# Altium PCB 001_BMS_MASTER.PcbDoc
Units mm, origin at the board's own origin, x right, y up, seen from the top; angles counter-clockwise.
Board outline 170.97 x 159.64 mm, 2 copper layers (Top Layer, Bottom Layer); 40 components, 0 nets, 208 pads, 0 vias.
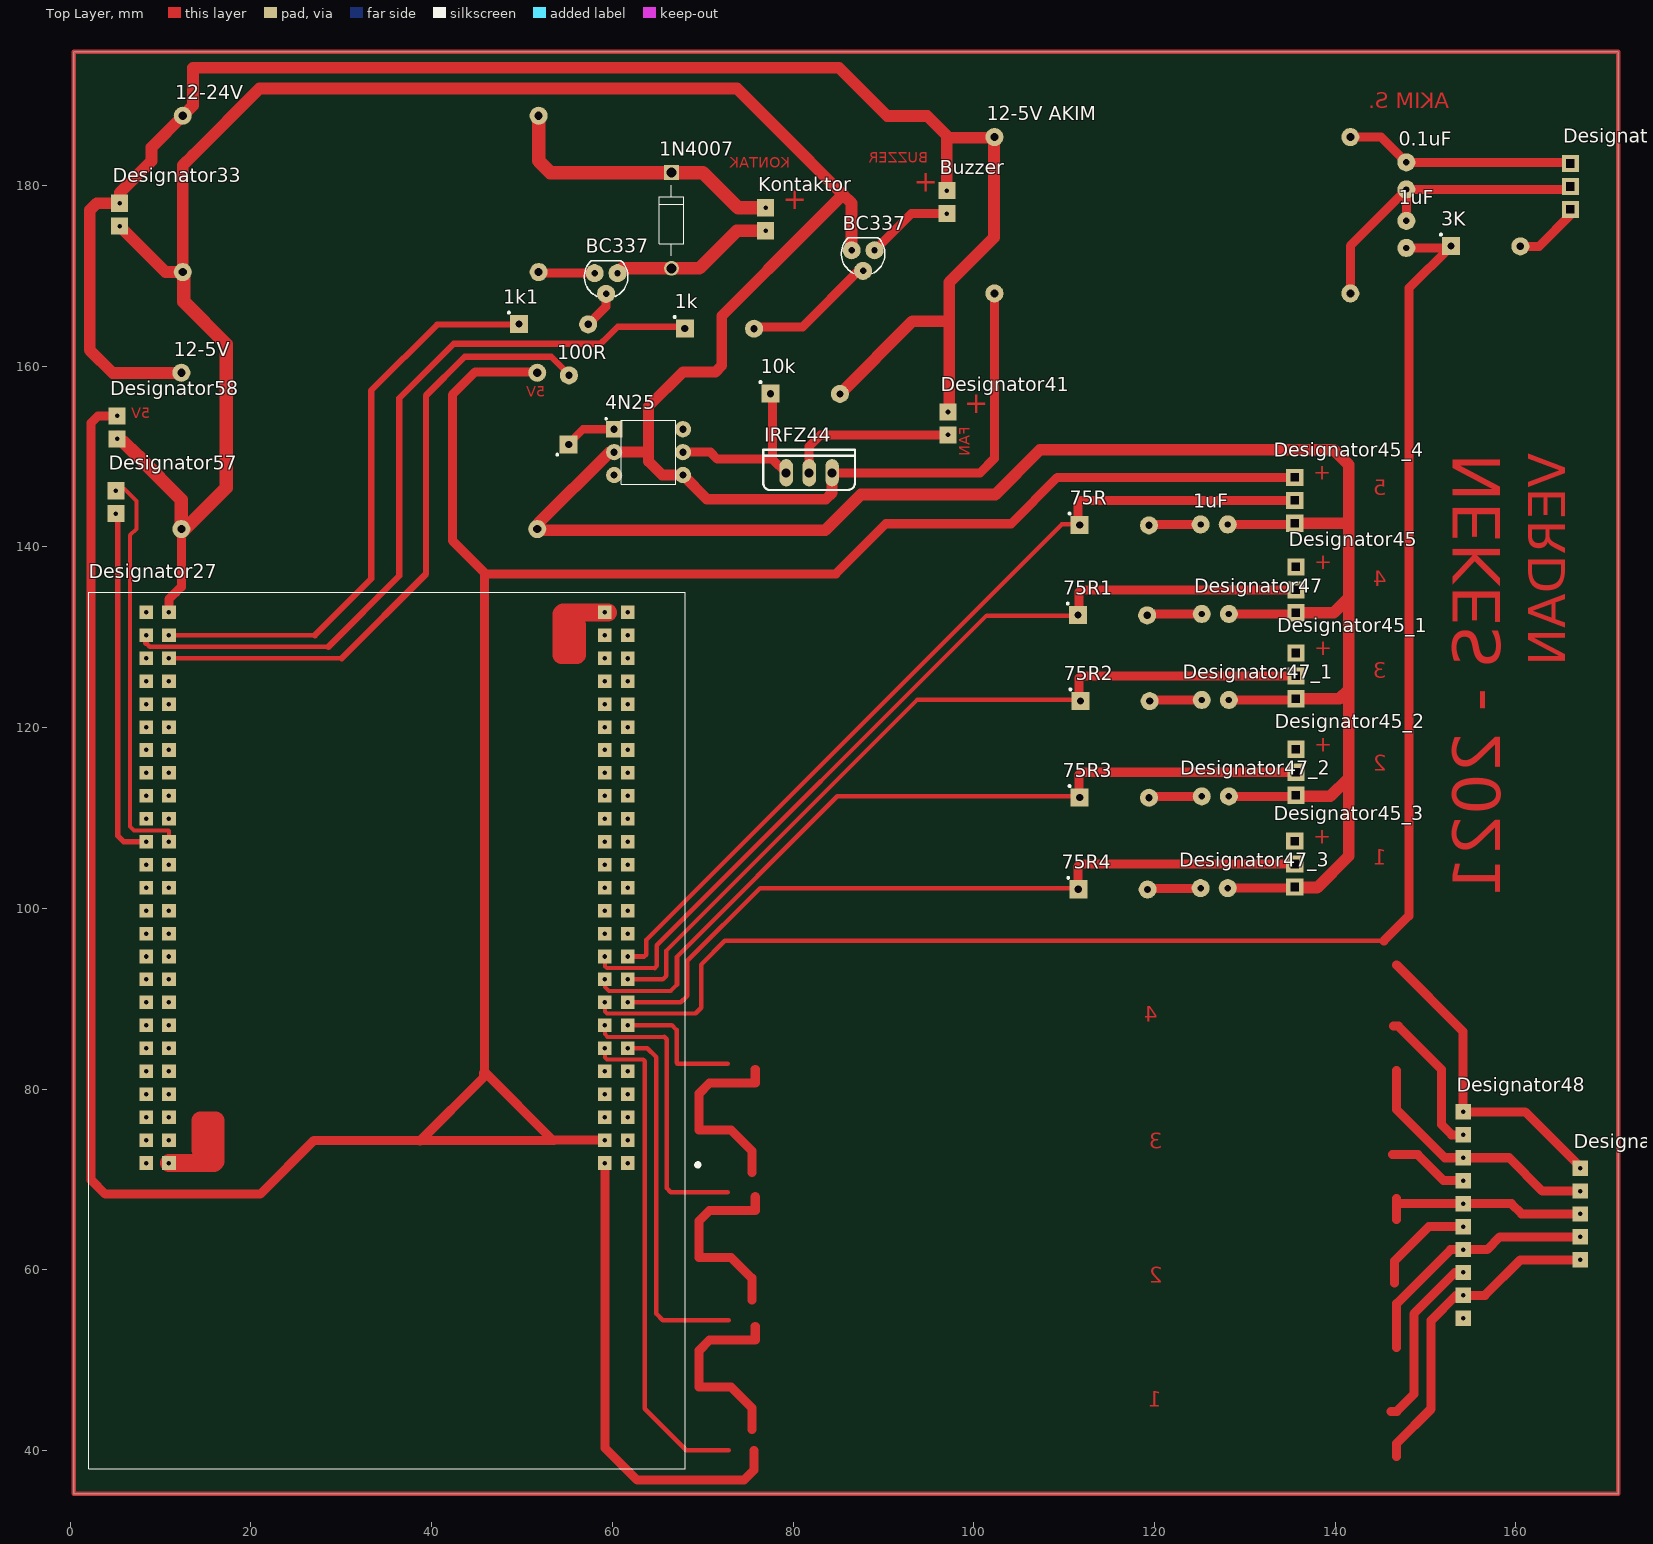
[diagram p0: Top Layer view]
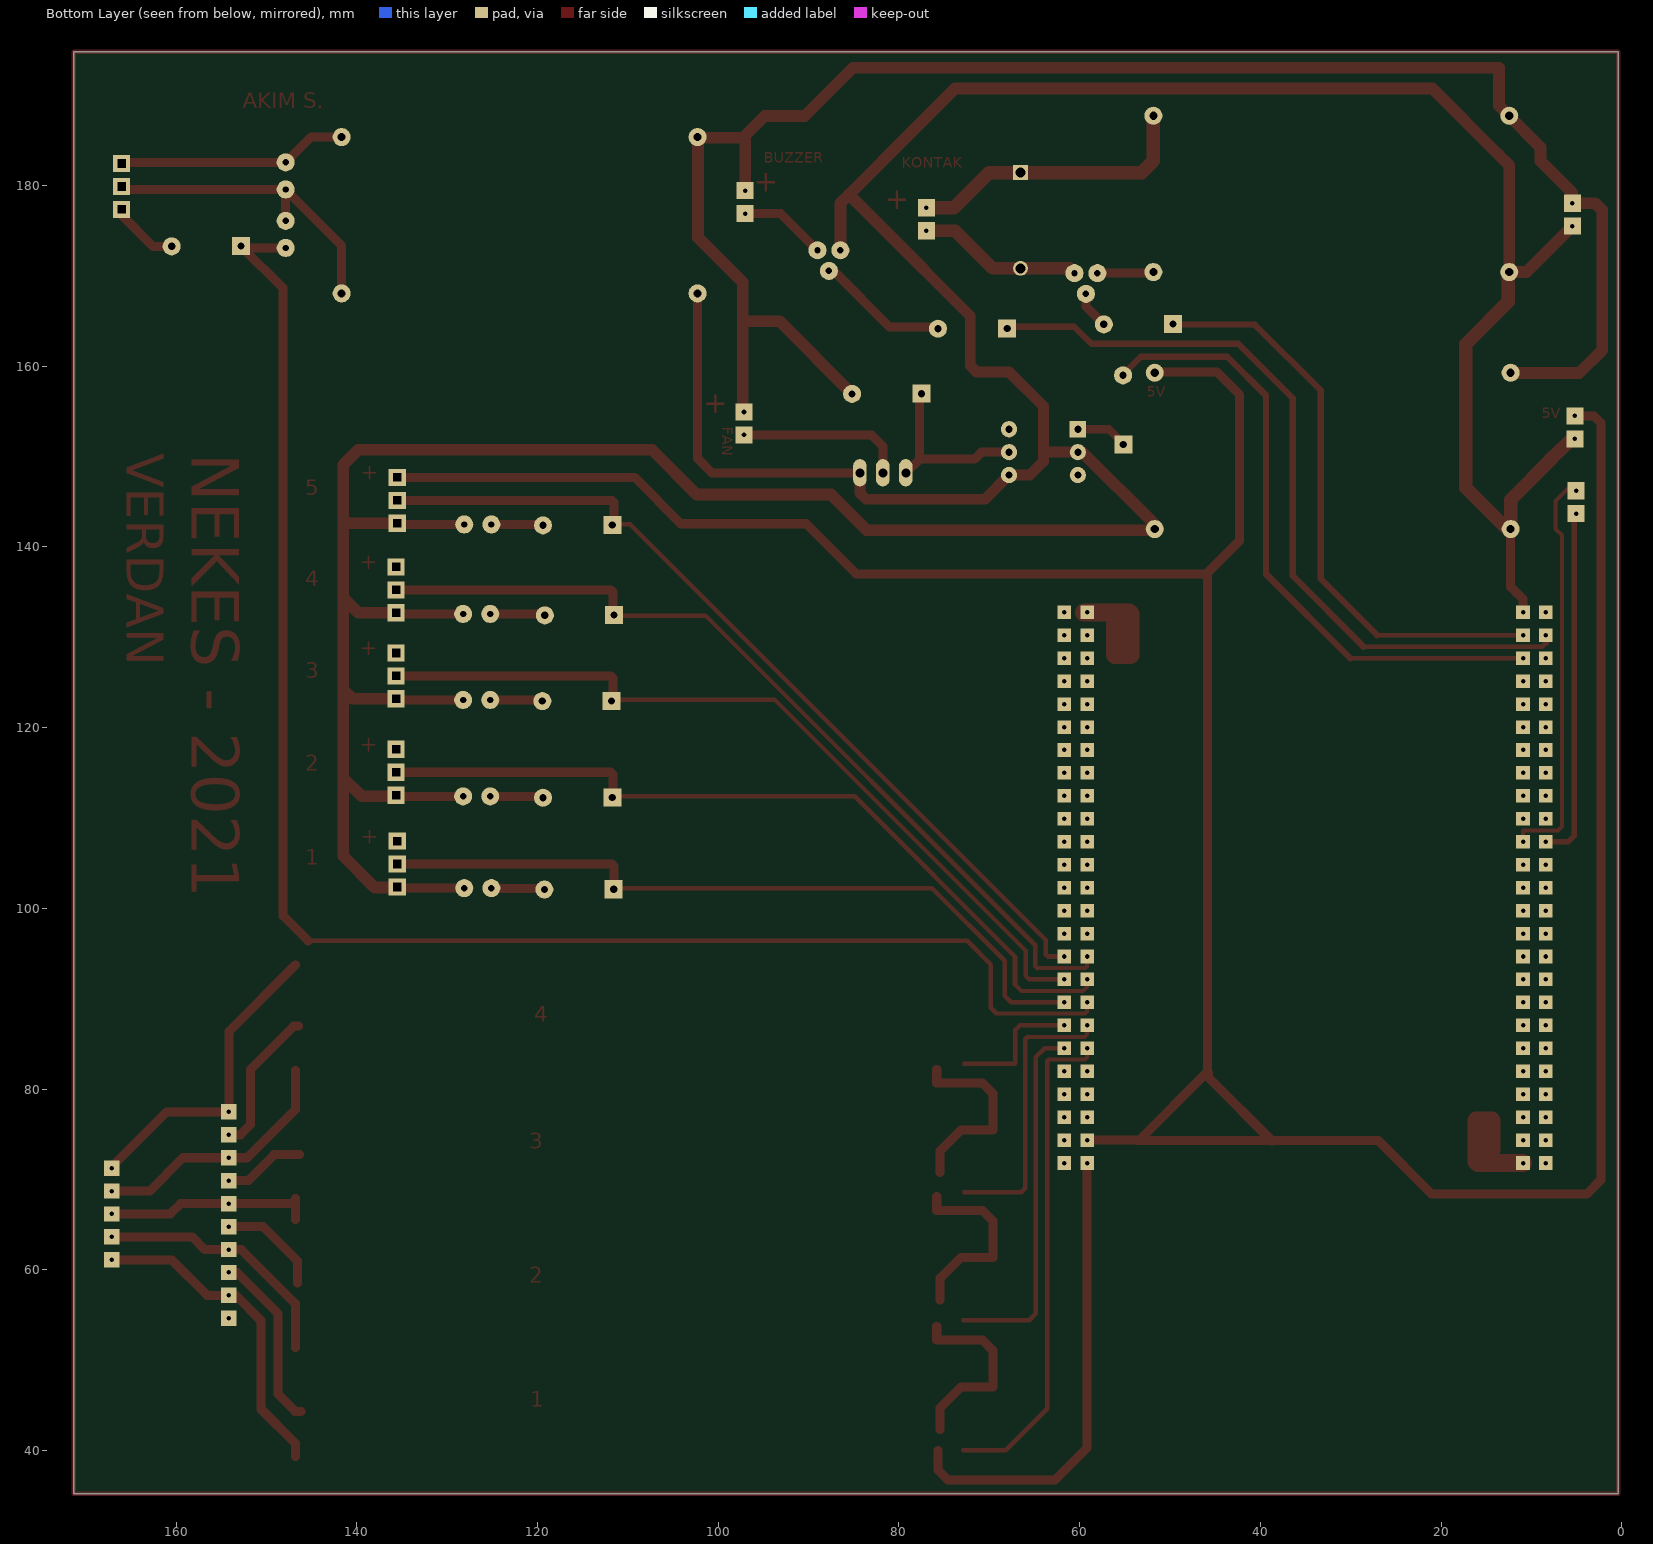
[diagram p1: Bottom Layer view, seen from below]

## Layer stack, top to bottom
Top Solder: solder mask 0.0102, Solder Resist, Dk 3.5
Top Layer: signal copper 0.0356
Dielectric 1: dielectric 0.32, FR-4, Dk 4.8
Bottom Layer: signal copper 0.0356
Bottom Solder: solder mask 0.0102, Solder Resist, Dk 3.5

## Board outline
0.381,35.179 0.381,194.818 171.348,194.818 171.348,35.179

## Design rules (kind name [scope] priority, off if disabled: settings)
Clearance [All] p1: gap=0.254 ignorepadtopadclearanceinfootprint=FALSE except(0: Arc-Hole Track-Hole SMDPad-Hole THPad-Hole Via-Hole Fill-Hole Poly-Hole Region-Hole Text-Hole)
PolygonConnect [All] p1: connectstyle=Relief reliefconductorwidth=0.254 reliefentries=4 polygonreliefangle="90 Angle" airgapwidth=0.254
RoutingVias [All] p1: holewidth=0.711 width=1.27 viastyle="Through Hole" minholewidth=0.711 minwidth=1.27 maxholewidth=0.711 maxwidth=1.27
SolderMaskExpansion [All] p1: expansion=0.102 istentingtop=FALSE
Width [All] p1: maxlimit=0.254 minlimit=0.254 preferedwidth=0.254
30 further rules are at their usual default settings.

## Components (designator, comment, footprint, x,y, rotation, side; value= is the part's Value field where it differs from the comment)
0.1uF "Comment" 10NF_KUTUPSUZ 147.888,179.576 r90 top
1k "Comment" "100 RESISTOR" 67.996,164.186 r0 top
1k1 "Comment" "100 RESISTOR" 49.632,164.668 r0 top
1N4007 "Comment" 1N4007 66.548,176.149 r270 top
1uF "Comment" 10NF_KUTUPSUZ 147.888,173.099 r90 top
1uF "Comment" 10NF_KUTUPSUZ 128.12,142.494 r180 top
3K "Comment" "100 RESISTOR" 152.816,173.305 r0 top
4N25 "Comment" 4N25-OPTO 64.008,150.495 r0 top
10k "Comment" "100 RESISTOR" 77.495,156.972 r0 top
12-5V "Comment" "HW-286 DC DC" 12.289,141.986 r0 top
"12-5V AKIM" "Comment" "HW-286 DC DC" 141.695,185.37 r180 top
12-24V "Comment" "HW-286 DC DC" 12.446,170.434 r0 top
75R "Comment" "100 RESISTOR" 111.709,142.418 r0 top
75R1 "Comment" "100 RESISTOR" 111.506,132.461 r0 top
75R2 "Comment" "100 RESISTOR" 111.785,122.961 r0 top
75R3 "Comment" "100 RESISTOR" 111.709,112.268 r0 top
75R4 "Comment" "100 RESISTOR" 111.557,102.108 r0 top
100R "Comment" "100 RESISTOR" 55.169,151.308 r90 top
BC337 "Comment" BC557 87.757,172.466 r180 top
BC337 "Comment" BC557 59.309,169.926 r180 top
Buzzer "Comment" 2XHEADER1 97.028,176.911 r90 top
Designator27 "Comment" STM32F4DISCOVERY 35.052,86.487 r180 top
Designator33 "Comment" 2XHEADER1 5.461,175.514 r90 top
Designator41 "Comment" 2XHEADER1 97.155,152.4 r90 top
Designator45 "Comment" 3XHEADER1 135.661,132.715 r90 top
Designator45_1 "Comment" 3XHEADER1 135.661,123.19 r90 top
Designator45_2 "Comment" 3XHEADER1 135.661,112.522 r90 top
Designator45_3 "Comment" 3XHEADER1 135.534,102.362 r90 top
Designator45_4 "Comment" 3XHEADER1 135.534,142.621 r90 top
Designator47 "Comment" 10NF_KUTUPSUZ 128.247,132.588 r180 top
Designator47_1 "Comment" 10NF_KUTUPSUZ 128.247,123.063 r180 top
Designator47_2 "Comment" 10NF_KUTUPSUZ 128.247,112.395 r180 top
Designator47_3 "Comment" 10NF_KUTUPSUZ 128.12,102.235 r180 top
Designator48 "Comment" "10XHEADER1 - DUPLICATE" 154.178,54.61 r90 top
Designator49 "Comment" 5XHEADER 167.132,61.087 r90 top
Designator50 "Comment" 3XHEADER1 166.049,177.369 r90 top
Designator57 "Comment" 2XHEADER1 5.055,143.688 r90 top
Designator58 "Comment" 2XHEADER1 5.182,151.968 r90 top
IRFZ44 "Comment" IRFZ44N 81.788,148.209 r0 top
Kontaktor "Comment" 2XHEADER1 76.962,175.006 r90 top

## Footprints (in the part's own frame and the unit in brackets; to place one, negate y for a bottom-side part, rotate by r counter-clockwise, add the part's x,y. Pads: shape width x height; smd on the part's side, far side on the other; paste and mask are expansions set on the pad)
1N4007 [mm]
  round 1.65 hole 1.1: A(5.3,0)
  rect 1.65x1.65 hole 1.1: C(-5.3,0)
  silkscreen extent -3.9,-1.35 3.9,1.35
2XHEADER1 [mm]
  rect 1.9x1.9 hole 0.5: 1(0,0) 2(2.54,0)
3XHEADER1 [mm]
  rect 1.9x1.9 hole 0.9 square: 1(0,0) 2(2.54,0) 3(5.08,0)
4N25-OPTO [mm]
  rect 1.8x1.8 hole 0.8: 1(-3.81,2.54)
  round 1.8 hole 0.8: 2(-3.81,0) 3(-3.81,-2.54) 4(3.81,-2.54) 5(3.81,0) 6(3.81,2.54)
  silkscreen extent -4.8,-3.56 3,3.8
5XHEADER [mm]
  rect 1.7x1.7 hole 0.5: 1(0,0) 2(2.54,0) 3(5.08,0) 4(7.62,0) 5(10.16,0)
10NF_KUTUPSUZ [mm]
  round 2 hole 0.7: 1(0,0) 2(3,0)
"10XHEADER1 - DUPLICATE" [mm]
  rect 1.7x1.7 hole 0.5: 1(0,0) 2(2.54,0) 3(5.08,0) 4(7.62,0) 5(10.16,0) 6(12.7,0) 7(15.24,0) 8(17.78,0) 9(20.32,0) 10(22.86,0)
"100 RESISTOR" [mm]
  rect 2x2 hole 0.8 mask+0.05: 1(0.025,0)
  round 2 hole 0.8 mask+0.05: 2(7.696,-0.025)
  silkscreen extent -1.18,1.18 -1,1.36, body extent -0.16,-1.08 7.94,0.92, height 2
BC557 [mm]
  round 2 hole 0.7: B(0,1.905) C(-1.27,-0.381) E(1.27,-0.381)
  silkscreen extent -2.41,-1.78 2.41,2.2
"HW-286 DC DC" [mm]
  round 2 hole 0.9: 1(0,0) 1(0,17.3) 1(39.4,0) 1(39.4,17.3)
IRFZ44N [mm]
  oval 1.508x3.016 hole 1: 1(-2.54,0) 2(0,0) 3(2.54,0)
  silkscreen extent -5.08,-1.91 5.08,2.54
STM32F4DISCOVERY [mm]
  rect 1.5x1.5 hole 0.5: P1_1(-26.67,14.68) P1_2(-24.13,14.68) P1_3(-26.67,12.14) P1_4(-24.13,12.14) P1_5(-26.67,9.6) P1_6(-24.13,9.6) P1_7(-26.67,7.06) P1_8(-24.13,7.06) P1_9(-26.67,4.52) P1_10(-24.13,4.52) P1_11(-26.67,1.98) P1_12(-24.13,1.98) P1_13(-26.67,-0.56) P1_14(-24.13,-0.56) P1_15(-26.67,-3.1) P1_16(-24.13,-3.1) P1_17(-26.67,-5.64) P1_18(-24.13,-5.64) P1_19(-26.67,-8.18) P1_20(-24.13,-8.18) P1_21(-26.67,-10.72) P1_22(-24.13,-10.72) P1_23(-26.67,-13.26) P1_24(-24.13,-13.26) P1_25(-26.67,-15.8) P1_26(-24.13,-15.8) P1_27(-26.67,-18.34) P1_28(-24.13,-18.34) P1_29(-26.67,-20.88) P1_30(-24.13,-20.88) P1_31(-26.67,-23.42) P1_32(-24.13,-23.42) P1_33(-26.67,-25.96) P1_34(-24.13,-25.96) P1_35(-26.67,-28.5) P1_36(-24.13,-28.5) P1_37(-26.67,-31.04) P1_38(-24.13,-31.04) P1_39(-26.67,-33.58) P1_40(-24.13,-33.58) P1_41(-26.67,-36.12) P1_42(-24.13,-36.12) P1_43(-26.67,-38.66) P1_44(-24.13,-38.66) P1_45(-26.67,-41.2) P1_46(-24.13,-41.2) P1_47(-26.67,-43.74) P1_48(-24.13,-43.74) P1_49(-26.67,-46.28) P1_50(-24.13,-46.28) P2_1(24.13,14.68) P2_2(26.67,14.68) P2_3(24.13,12.14) P2_4(26.67,12.14) P2_5(24.13,9.6) P2_6(26.67,9.6) P2_7(24.13,7.06) P2_8(26.67,7.06) P2_9(24.13,4.52) P2_10(26.67,4.52) P2_11(24.13,1.98) P2_12(26.67,1.98) P2_13(24.13,-0.56) P2_14(26.67,-0.56) P2_15(24.13,-3.1) P2_16(26.67,-3.1) P2_17(24.13,-5.64) P2_18(26.67,-5.64) P2_19(24.13,-8.18) P2_20(26.67,-8.18) P2_21(24.13,-10.72) P2_22(26.67,-10.72) P2_23(24.13,-13.26) P2_24(26.67,-13.26) P2_25(24.13,-15.8) P2_26(26.67,-15.8) P2_27(24.13,-18.34) P2_28(26.67,-18.34) P2_29(24.13,-20.88) P2_30(26.67,-20.88) P2_31(24.13,-23.42) P2_32(26.67,-23.42) P2_33(24.13,-25.96) P2_34(26.67,-25.96) P2_35(24.13,-28.5) P2_36(26.67,-28.5) P2_37(24.13,-31.04) P2_38(26.67,-31.04) P2_39(24.13,-33.58) P2_40(26.67,-33.58) P2_41(24.13,-36.12) P2_42(26.67,-36.12) P2_43(24.13,-38.66) P2_44(26.67,-38.66) P2_45(24.13,-41.2) P2_46(26.67,-41.2) P2_47(24.13,-43.74) P2_48(26.67,-43.74) P2_49(24.13,-46.28) P2_50(26.67,-46.28)
  silkscreen extent -34.61,-48.5 33,48.5

## Nets (pads, with @x,y where several pads share a name; then routed paths per layer and width w, separated by ;. In a path a pad name is that pad's centre, name@x,y a point inside that pad or via, vN(x,y) a via of type N, cw(c..) or ccw(c..) an arc to the next point about the centre after c; other vN are vias at no path point)
pads on no net: 0.1uF.1 0.1uF.2 1k1.1 1k1.2 1k.1 1k.2 1N4007.A 1N4007.C 1uF.1 1uF.2 3K.1 3K.2 4N25.1 4N25.2 4N25.3 4N25.4 4N25.5 4N25.6 10k.1 10k.2 12-5V.1 12-24V.1 75R1.1 75R1.2 75R2.1 75R2.2 75R3.1 75R3.2 75R4.1 75R4.2 75R.1 75R.2 100R.1 100R.2 "12-5V AKIM.1" BC337.B BC337.C BC337.E Buzzer.1 Buzzer.2 Designator27.P1_1 Designator27.P1_2 Designator27.P1_3 Designator27.P1_4 Designator27.P1_5 Designator27.P1_6 Designator27.P1_7 Designator27.P1_8 Designator27.P1_9 Designator27.P1_10 Designator27.P1_11 Designator27.P1_12 Designator27.P1_13 Designator27.P1_14 Designator27.P1_15 Designator27.P1_16 Designator27.P1_17 Designator27.P1_18 Designator27.P1_19 Designator27.P1_20 Designator27.P1_21 Designator27.P1_22 Designator27.P1_23 Designator27.P1_24 Designator27.P1_25 Designator27.P1_26 Designator27.P1_27 Designator27.P1_28 Designator27.P1_29 Designator27.P1_30 Designator27.P1_31 Designator27.P1_32 Designator27.P1_33 Designator27.P1_34 Designator27.P1_35 Designator27.P1_36 Designator27.P1_37 Designator27.P1_38 Designator27.P1_39 Designator27.P1_40 Designator27.P1_41 Designator27.P1_42 Designator27.P1_43 Designator27.P1_44 Designator27.P1_45 Designator27.P1_46 Designator27.P1_47 Designator27.P1_48 Designator27.P1_49 Designator27.P1_50 Designator27.P2_1 Designator27.P2_2 Designator27.P2_3 Designator27.P2_4 Designator27.P2_5 Designator27.P2_6 Designator27.P2_7 Designator27.P2_8 Designator27.P2_9 Designator27.P2_10 Designator27.P2_11 Designator27.P2_12 Designator27.P2_13 Designator27.P2_14 Designator27.P2_15 Designator27.P2_16 Designator27.P2_17 Designator27.P2_18 Designator27.P2_19 Designator27.P2_20 Designator27.P2_21 Designator27.P2_22 Designator27.P2_23 Designator27.P2_24 Designator27.P2_25 Designator27.P2_26 Designator27.P2_27 Designator27.P2_28 Designator27.P2_29 Designator27.P2_30 Designator27.P2_31 Designator27.P2_32 Designator27.P2_33 Designator27.P2_34 Designator27.P2_35 Designator27.P2_36 Designator27.P2_37 Designator27.P2_38 Designator27.P2_39 Designator27.P2_40 Designator27.P2_41 Designator27.P2_42 Designator27.P2_43 Designator27.P2_44 Designator27.P2_45 Designator27.P2_46 Designator27.P2_47 Designator27.P2_48 Designator27.P2_49 Designator27.P2_50 Designator33.1 Designator33.2 Designator41.1 Designator41.2 Designator45.1 Designator45.2 Designator45.3 Designator45_1.1 Designator45_1.2 Designator45_1.3 Designator45_2.1 Designator45_2.2 Designator45_2.3 Designator45_3.1 Designator45_3.2 Designator45_3.3 Designator45_4.1 Designator45_4.2 Designator45_4.3 Designator47.1 Designator47.2 Designator47_1.1 Designator47_1.2 Designator47_2.1 Designator47_2.2 Designator47_3.1 Designator47_3.2 Designator48.1 Designator48.2 Designator48.3 Designator48.4 Designator48.5 Designator48.6 Designator48.7 Designator48.8 Designator48.9 Designator48.10 Designator49.1 Designator49.2 Designator49.3 Designator49.4 Designator49.5 Designator50.1 Designator50.2 Designator50.3 Designator57.1 Designator57.2 Designator58.1 Designator58.2 IRFZ44.1 IRFZ44.2 IRFZ44.3 Kontaktor.1 Kontaktor.2
copper on no net: | length 3365
  Top Layer w0.45: 4.953,146.406 6.02,146.406 7.315,145.11 7.315,142.011 6.604,141.3 6.604,109.042 7.036,108.61 7.239,108.61 10.871,108.61 10.922,108.56 10.922,107.367 ; 59.182,84.507 59.182,83.464 59.385,83.261 63.424,83.261 ; 59.182,87.047 59.182,86.081 59.487,85.776 65.761,85.776 ; 59.182,89.587 59.182,88.57 59.385,88.367 69.215,88.367 ; 59.182,92.127 59.182,91.288 59.614,90.856 66.446,90.856 ; 59.182,94.667 59.182,93.574 59.385,93.37 64.668,93.37
  Top Layer w0.5: 8.382,129.362 8.788,128.956 28.575,128.956 ; 10.922,127.687 30.049,127.687 ; 10.922,130.227 27.078,130.227 ; 61.722,84.507 63.88,84.507 64.846,83.541 64.846,55.143 65.583,54.407 72.898,54.407 ; 61.722,87.047 66.598,87.047 67.107,86.538 67.107,82.88 67.183,82.804 72.771,82.804 ; 61.722,89.587 67.591,89.587 68.301,90.297 68.301,94.183 76.352,102.235 111.531,102.235 ; 61.722,92.127 65.584,92.127 65.989,92.532 65.989,95.326 93.726,123.063 111.658,123.063 ; 61.722,94.667 63.552,94.667 63.754,94.869 63.754,96.495 109.753,142.494 111.531,142.494 ; 63.424,83.261 63.602,83.083 63.602,44.602 68.199,40.005 72.898,40.005 ; 64.668,93.37 64.922,93.624 64.922,95.91 101.422,132.41 111.785,132.41 ; 65.761,85.776 66.015,85.522 66.015,69.037 66.472,68.58 72.796,68.58 ; 66.446,90.856 67.158,91.567 67.158,94.64 84.912,112.395 111.658,112.395 ; 69.215,88.367 69.825,88.976 69.825,93.777 72.441,96.393 145.415,96.393 ; 0.381,35.179 0.381,194.818 171.348,194.818 171.348,35.179 0.381,35.179
  Top Layer w0.6: 4.953,143.866 5.258,143.561 5.258,108.026 5.917,107.367 8.382,107.367
  Top Layer w0.7: 8.382,129.362 8.382,130.227 ; 27.078,130.227 33.325,136.474 33.325,157.328 40.615,164.617 49.606,164.617 ; 28.575,128.956 36.424,136.804 36.424,138.176 36.424,156.464 42.443,162.484 58.649,162.484 58.877,162.712 58.953,162.712 60.604,164.363 61.366,164.363 68.631,164.363 ; 30.049,127.687 39.37,137.008 39.37,156.769 43.561,160.96 43.663,161.061 53.238,161.061 55.499,158.801
  Top Layer w0.9: 55.27,151.536 56.769,153.035 60.198,153.035
  Top Layer w1: 5.182,154.508 3.073,154.508 2.311,153.746 2.311,69.926 3.886,68.351 5.029,68.351 5.613,68.351 21.006,68.351 26.975,74.32 38.71,74.32 53.543,74.32 ; 10.922,132.767 10.922,134.214 11.695,134.987 12.289,135.581 12.289,141.986 ; 38.71,74.244 45.745,81.28 45.745,81.763 ; 45.847,137.033 84.734,137.033 90.272,142.57 104.14,142.57 109.271,147.701 135.534,147.701 ; 51.689,141.986 51.689,142.494 ; 51.943,159.385 44.831,159.385 42.291,156.845 42.291,151.638 42.291,140.716 45.847,137.16 45.847,81.89 53.39,74.347 56.262,74.347 59.182,74.347 ; 51.973,170.307 58.039,170.307 ; 57.277,164.592 59.309,166.624 59.309,168.021 ; 59.182,71.807 59.182,40.284 62.763,36.703 74.549,36.703 75.692,37.846 75.692,40.005 ; 67.818,150.495 70.866,150.495 71.628,149.733 77.724,149.733 ; 73.533,190.754 73.787,190.754 ; 75.438,42.291 75.438,44.704 73.152,46.99 69.596,46.99 69.596,51.054 70.739,52.197 75.819,52.197 75.819,53.721 ; 75.438,56.642 75.438,59.055 73.152,61.341 69.596,61.341 69.596,65.405 70.739,66.548 75.819,66.548 75.819,68.072 ; 75.438,70.739 75.438,73.152 73.152,75.438 69.596,75.438 69.596,79.502 70.739,80.645 75.819,80.645 75.819,82.169 ; 76.302,164.338 81.026,164.338 87.249,170.561 87.757,170.561 ; 77.724,156.972 77.724,149.733 ; 79.248,148.209 77.724,149.733 ; 81.788,148.209 81.788,151.13 83.058,152.4 90.043,152.4 94.361,152.4 97.155,152.4 ; 84.328,148.209 100.711,148.209 102.295,149.793 102.295,155.906 102.295,168.07 ; 89.027,172.847 93.091,176.911 97.028,176.911 ; 111.531,102.235 111.531,104.648 111.785,104.902 135.534,104.902 ; 111.531,142.494 111.531,144.907 111.785,145.161 135.534,145.161 ; 111.658,112.395 111.658,114.808 111.912,115.062 135.661,115.062 ; 111.658,123.063 111.658,125.476 111.912,125.73 135.661,125.73 ; 111.658,132.588 111.658,135.001 111.912,135.255 135.661,135.255 ; 119.202,102.21 125.095,102.21 ; 119.202,142.469 125.095,142.469 125.12,142.494 ; 119.329,112.37 125.222,112.37 125.247,112.395 ; 119.329,123.038 125.222,123.038 125.247,123.063 ; 119.329,132.563 125.222,132.563 125.247,132.588 ; 128.12,102.235 135.407,102.235 135.534,102.362 ; 128.12,142.494 135.407,142.494 135.534,142.621 ; 128.247,112.395 135.534,112.395 135.661,112.522 ; 128.247,123.063 135.534,123.063 135.661,123.19 ; 128.247,132.588 135.534,132.588 135.661,132.715 ; 141.249,142.621 141.503,142.875 ; 141.695,168.07 141.695,173.335 147.888,179.528 147.888,179.576 ; 141.695,185.37 145.094,185.37 147.888,182.576 165.922,182.576 ; 145.415,96.393 148.184,99.162 148.184,168.648 152.841,173.305 152.635,173.099 147.888,173.099 ; 146.202,44.323 146.848,44.323 ; 146.375,72.75 149.194,72.75 ; 146.494,86.957 147.002,86.957 ; 146.573,58.549 146.573,60.948 150.395,64.77 152.019,64.77 154.178,64.77 ; 146.8,65.55 146.8,67.9 ; 146.812,51.4 146.812,56.237 152.805,62.23 154.178,62.23 156.845,62.23 158.242,63.627 167.132,63.627 ; 146.812,67.31 154.178,67.31 159.512,67.31 160.655,66.167 167.132,66.167 ; 146.812,82.042 146.812,80.264 146.812,77.724 152.146,72.39 154.178,72.39 ; 146.812,93.726 154.178,86.36 154.178,77.47 161.036,77.47 167.132,71.374 167.132,71.247 ; 146.825,39.3 146.825,40.78 150.622,44.577 150.622,54.372 153.4,57.15 154.178,57.15 156.591,57.15 160.528,61.087 167.132,61.087 ; 146.848,44.348 148.717,46.217 148.717,55.117 153.29,59.69 154.178,59.69 ; 147.002,86.931 151.765,82.169 151.765,76.073 152.908,74.93 154.178,74.93 ; 147.888,176.099 147.888,179.552 165.692,179.552 166.049,179.909 ; 149.194,72.675 152.019,69.85 154.178,69.85 ; 153.924,72.644 154.178,72.39 ; 160.512,173.28 162.595,173.28 166.176,176.861 166.176,177.496 ; 167.132,68.707 162.941,68.707 159.258,72.39 154.178,72.39
  Top Layer w1.2: 60.198,150.495 63.983,150.495 ; 77.216,170.688 72.111,165.583 72.111,160.088 71.408,159.385 67.818,159.385 64.008,155.575 64.008,150.495 64.008,149.479 65.532,147.955 67.818,147.955 70.485,145.288 83.625,145.288 84.328,145.991 84.328,148.209
  Top Layer w1.3: 2.159,161.798 4.699,159.258 12.289,159.258 ; 2.159,162.052 2.159,177.292 2.921,178.054 5.461,178.054 5.461,179.197 8.998,182.734 8.998,184.258 12.446,187.706 ; 5.461,175.514 10.541,170.434 12.446,170.434 12.446,178.054 12.446,182.245 13.589,183.388 20.955,190.754 73.533,190.754 ; 12.446,187.734 13.589,188.877 13.589,193.04 18.161,193.04 85.09,193.04 90.424,187.706 94.869,187.706 97.028,185.547 97.028,179.451 ; 51.689,141.859 83.566,141.859 87.503,145.796 102.387,145.796 107.34,150.749 139.852,150.749 141.503,149.098 141.503,142.875 141.503,134.366 ; 51.689,142.309 51.823,142.309 51.823,142.628 59.688,150.493 60.194,150.493 60.194,150.495 ; 73.787,190.754 78.359,186.182 85.534,179.006 86.487,178.054 86.487,172.847 ; 77.216,170.688 85.471,178.943 ; 85.217,156.972 93.218,164.973 97.282,164.973 ; 97.155,154.94 97.282,155.067 97.282,169.291 102.235,174.244 102.235,182.245 102.235,185.31 ; 97.265,185.31 102.235,185.31 ; 102.295,185.37 102.235,185.31 ; 135.471,102.298 138.011,102.298 141.503,105.791 141.503,114.427 ; 135.534,112.395 139.471,112.395 141.503,114.427 ; 135.534,142.621 141.249,142.621 ; 135.661,123.19 140.487,123.19 141.503,124.206 ; 135.661,132.715 139.852,132.715 141.503,134.366 ; 141.503,114.427 141.503,124.206 ; 141.503,124.206 141.503,134.366
  Top Layer w1.4: 60.579,170.307 61.121,170.849 66.548,170.849 69.63,170.849 73.787,175.006 76.962,175.006
  Top Layer w1.5: 5.309,152.146 7.899,149.682 ; 7.665,149.865 12.289,145.242 12.289,141.986 ; 12.446,141.732 17.272,146.558 17.272,162.433 12.573,167.132 12.573,170.307 ; 51.846,187.734 51.846,182.734 53.131,181.449 66.548,181.449 70.011,181.449 73.914,177.546 76.962,177.546
  Top Layer w2: 10.922,71.807 15.899,71.807 16.078,71.986 16.078,76.505 14.402,76.505 14.402,73.228 14.478,73.152 ; 55.982,131.42 56.058,131.343 56.058,128.067 54.381,128.067 54.381,132.586 54.56,132.765 59.538,132.765

## Other copper
Top Layer:
  text "AKIM S." at 152.654,187.952 h3
  text "BUZZER" at 94.994,182.155 h2
  text "KONTAK" at 79.678,181.571 h2
  text "+" at 93.345,178.525 h4
  text "+" at 78.867,176.62 h4
  text "5V" at 52.551,156.247 h2
  text "+" at 98.933,154.014 h4
  text "5V" at 8.837,153.86 h2
  text "FAN" at 99.974,153.287 h2 r90
  text "NEKES - 2021" at 160.018,150.393 h9 r90
  text "VERDAN" at 166.864,150.387 h7 r90
  text "+" at 137.566,146.816 h3
  text "5" at 145.697,145.102 h3
  text "+" at 137.693,136.91 h3
  text "4" at 145.7,135.052 h3
  text "+" at 137.693,127.385 h3
  text "3" at 145.7,124.859 h3
  text "+" at 137.693,116.717 h3
  text "2" at 145.7,114.63 h3
  text "+" at 137.566,106.557 h3
  text "1" at 145.7,104.191 h3
  text "4" at 120.396,86.817 h3
  text "3" at 120.929,72.763 h3
  text "2" at 120.929,57.937 h3
  text "1" at 120.828,44.221 h3

## Silkscreen, mask and mechanical layers (free items; w line width, h text height)
Mechanical 1:
  lines w1: 51.846,170.434 51.973,170.307 ; 125.095,102.21 125.12,102.235

## Panel: embedded boards
"D:\Belgeler\Altium\BYS\002_BMS_SLAVE\001_BMS_SLAVE.PcbDoc" at 71.12,38.227, 4 rows x 1 columns, spacing 14.216 x 38.1, rotation 0